# Altium PCB Central childboard.PcbDoc
Units mm, origin at the board's own origin, x right, y up, seen from the top; angles counter-clockwise.
Board outline 68.46 x 92.2 mm, 2 copper layers (Top Layer, Bottom Layer); 25 components, 48 nets, 134 pads, 97 vias.
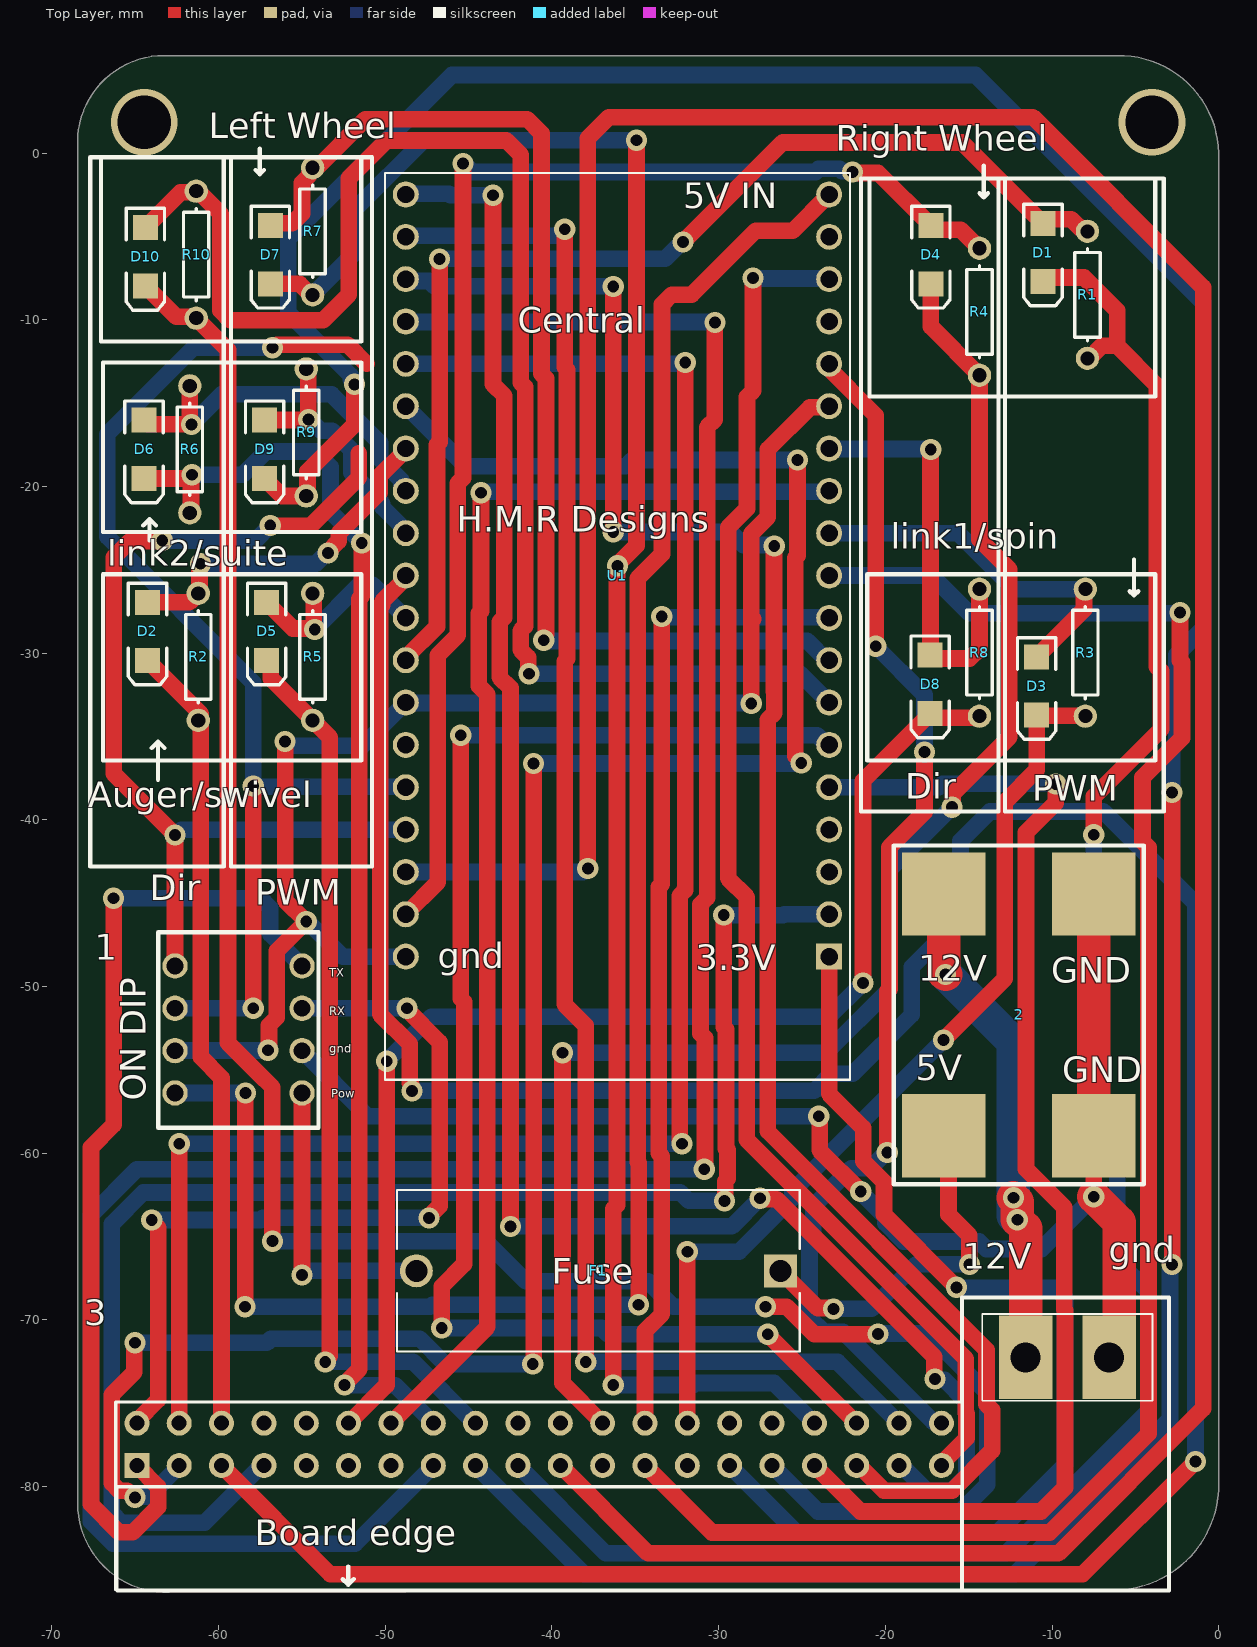
[diagram p0: Top Layer view]
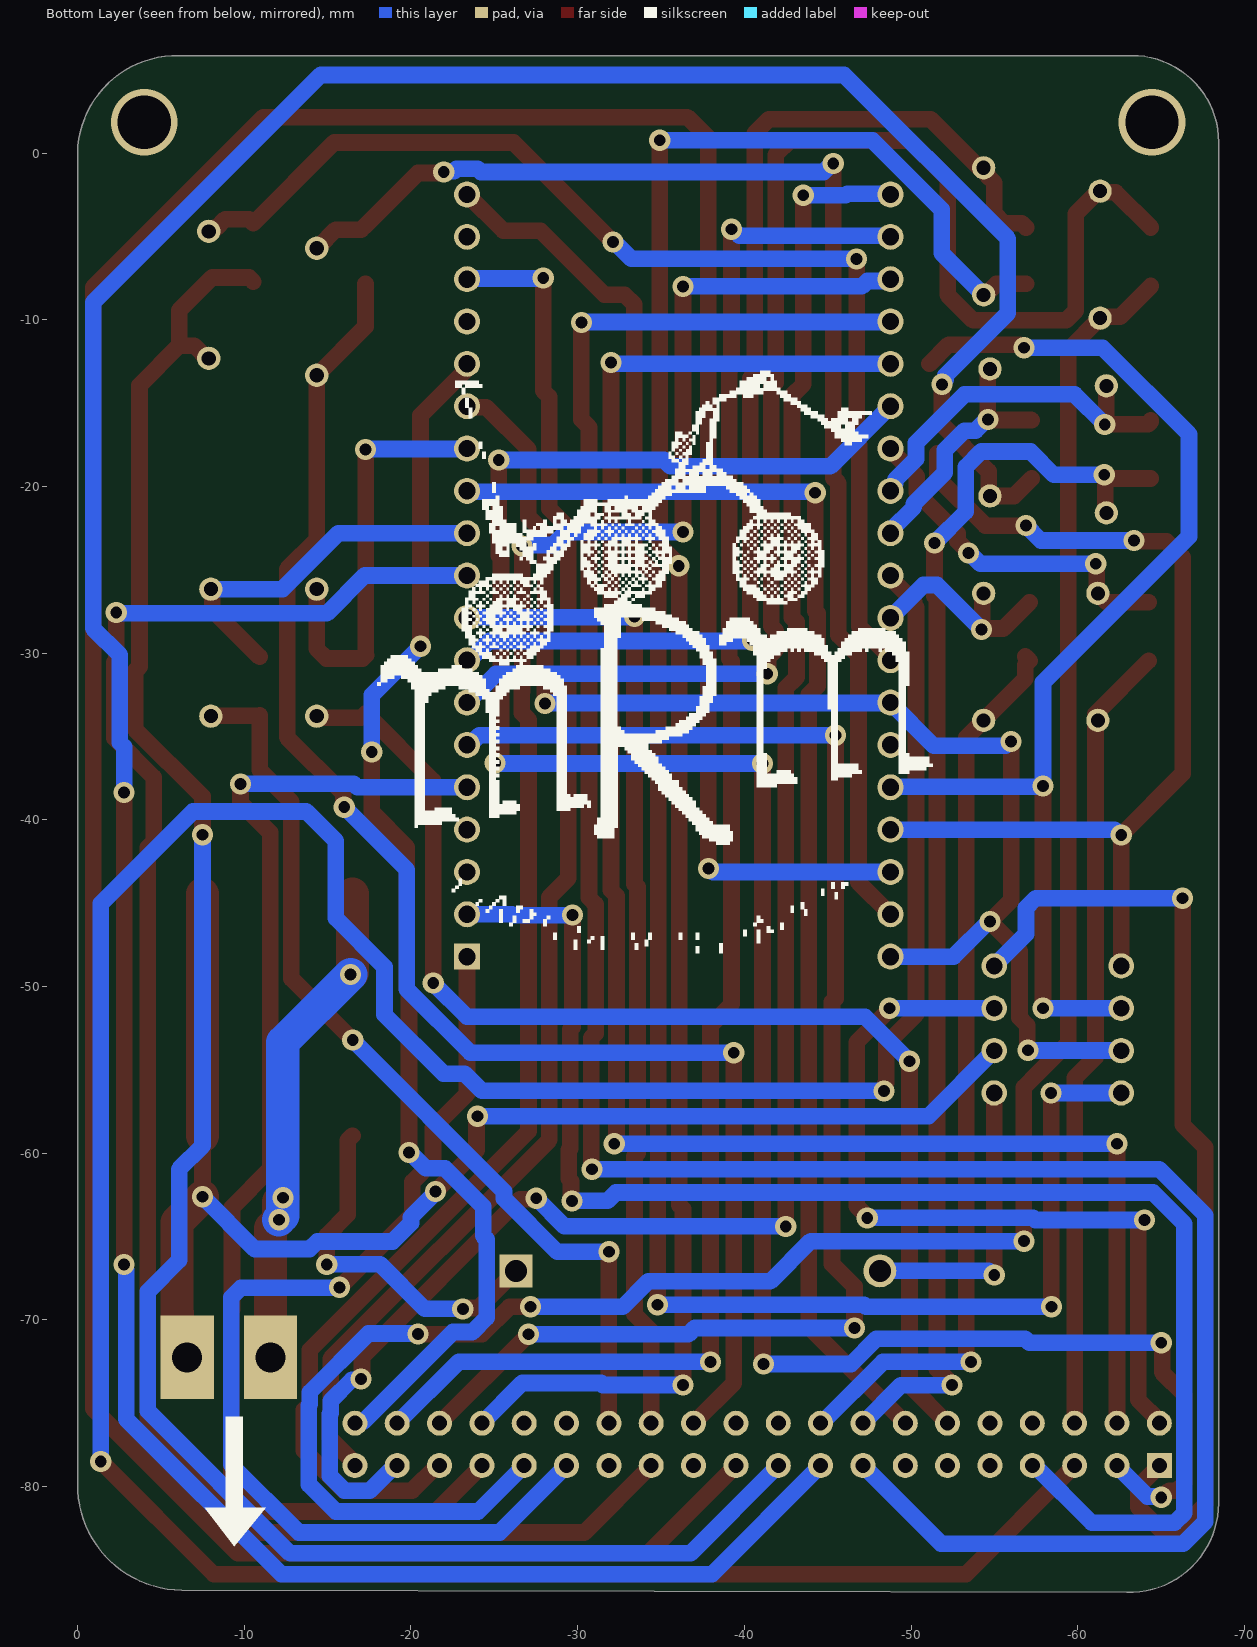
[diagram p1: Bottom Layer view, seen from below]

## Layer stack, top to bottom
Top Solder: solder mask 0.0102, Solder Resist, Dk 3.5
Top Layer: signal copper 0.0356
Dielectric 1: dielectric 0.32, FR-4, Dk 4.8
Bottom Layer: signal copper 0.0356
Bottom Solder: solder mask 0.0102, Solder Resist, Dk 3.5

## Board outline
-68.449,-80.997 -68.449,0.635 -68.459,0.635 cw(c-63.246,0.635) -63.246,5.848 -63.246,5.842 -6.096,5.842 cw(c-5.969,-0.127) 0,0 -0.002,-79.828 cw(c-6.319,-79.899) -6.248,-86.216 -62.95,-86.353 cw(c-63.091,-80.997)

## Design rules (kind name [scope] priority, off if disabled: settings)
Clearance [All] p1: gap=0.254 ignorepadtopadclearanceinfootprint=FALSE except(0: Arc-Hole Track-Hole SMDPad-Hole THPad-Hole Via-Hole Fill-Hole Poly-Hole Region-Hole Text-Hole)
PolygonConnect [All] p1: connectstyle=Relief reliefconductorwidth=0.254 reliefentries=4 polygonreliefangle="90 Angle" airgapwidth=0.254
RoutingVias [All] p1: holewidth=0.711 width=1.27 viastyle="Through Hole" minholewidth=0.711 minwidth=1.27 maxholewidth=0.711 maxwidth=1.27
SolderMaskExpansion [All] p1: expansion=0.102 istentingtop=FALSE
Width [All] p1: maxlimit=10 minlimit=0.254 preferedwidth=1 minimp=50.000000 maximp=50.000000 favimp=50.000000
30 further rules are at their usual default settings.

## Components (designator, comment, footprint, x,y, rotation, side; value= is the part's Value field where it differs from the comment)
1 "2.54 switch  dip" "2.54mm Pitch 4 Way DIP Slide Switch" -54.011,-58.468 r90 top
2 "microbuck" "Micro buck" -11.993,-51.7 r0 top
3 "breakoutboard" "breakoutboard connections" -69.997,-78.45 r270 top
D1 "LED2" 3.2X1.6X1.1 -10.541,-5.969 r270 top
D2 "LED2" 3.2X1.6X1.1 -64.262,-28.702 r270 top
D3 "LED2" 3.2X1.6X1.1 -10.922,-31.976 r270 top
D4 "LED2" 3.2X1.6X1.1 -17.272,-6.096 r270 top
D5 "LED2" 3.2X1.6X1.1 -57.108,-28.702 r270 top
D6 "LED2" 3.2X1.6X1.1 -64.469,-17.78 r270 top
D7 "LED2" 3.2X1.6X1.1 -56.896,-6.096 r270 top
D8 "LED2" 3.2X1.6X1.1 -17.305,-31.877 r270 top
D9 "LED2" 3.2X1.6X1.1 -57.235,-17.78 r270 top
D10 "LED2" 3.2X1.6X1.1 -64.389,-6.223 r270 top
F1 "4527" FUSE_4527 -37.211,-67.056 r180 top
R1 "Res1" AXIAL-0.3 -7.874,-8.509 r270 top value=1K
R2 "Res1" AXIAL-0.3 -61.214,-30.226 r270 top value=1K
R3 "Res1" AXIAL-0.3 -8.001,-29.972 r270 top value=1K
R4 "Res1" AXIAL-0.3 -14.351,-9.525 r270 top value=1K
R5 "Res1" AXIAL-0.3 -54.356,-30.226 r270 top value=1K
R6 "Res1" AXIAL-0.3 -61.722,-17.78 r270 top value=1K
R7 "Res1" AXIAL-0.3 -54.356,-4.699 r270 top value=1K
R8 "Res1" AXIAL-0.3 -14.351,-29.972 r270 top value=1K
R9 "Res1" AXIAL-0.3 -54.737,-16.764 r270 top value=1K
R10 "Res1" AXIAL-0.3 -61.341,-6.096 r270 top value=1K
U1 "ESP32-DEVKITC-32D" MODULE_ESP32-DEVKITC-32D -36.068,-28.448 r180 top

## Footprints (in the part's own frame and the unit in brackets; to place one, negate y for a bottom-side part, rotate by r counter-clockwise, add the part's x,y. Pads: shape width x height; smd on the part's side, far side on the other; paste and mask are expansions set on the pad)
"2.54mm Pitch 4 Way DIP Slide Switch" [mm]
  round 1.524 hole 1: 1(2.08,0.98) 2(4.62,0.98) 3(7.16,0.98) 4(9.7,0.98) 5(2.08,8.6) 6(4.62,8.6) 7(7.16,8.6) 8(9.7,8.6)
  silkscreen extent 0,0 11.72,9.6
3.2X1.6X1.1 [mm] "SMT LED; 2 Flat Leads"
  rect 1.5x1.5 smd: 1(-1.75,0) 2(1.75,0)
  silkscreen extent -2.9,-1.15 3.2,1.15
AXIAL-0.3 [mm] "Axial Device, Thru-Hole; 2 Leads; 0.3 in Pin Spacing"
  round 1.4 hole 0.85: 1(-3.81,0) 2(3.81,0)
  silkscreen extent -2.77,-0.76 2.77,0.76
"breakoutboard connections" [mm]
  rect 1.5x1.5 hole 0.9: 1(0.29,5.1)
  round 1.5 hole 0.9: 2(-2.25,5.1) 3(0.29,7.64) 4(-2.25,7.64) 5(0.29,10.18) 6(-2.25,10.18) 7(0.29,12.72) 8(-2.25,12.72) 9(0.29,15.26) 10(-2.25,15.26) 11(0.29,17.8) 12(-2.25,17.8) 13(0.29,20.34) 14(-2.25,20.34) 15(0.29,22.88) 16(-2.25,22.88) 17(0.29,25.42) 18(-2.25,25.42) 19(0.29,27.96) 20(-2.25,27.96) 21(0.29,30.5) 22(-2.25,30.5) 23(0.29,33.04) 24(-2.25,33.04) 25(0.29,35.58) 26(-2.25,35.58) 27(0.29,38.12) 28(-2.25,38.12) 29(0.29,40.66) 30(-2.25,40.66) 31(0.29,43.2) 32(-2.25,43.2) 33(0.29,45.74) 34(-2.25,45.74) 35(0.29,48.28) 36(-2.25,48.28) 37(0.29,50.82) 38(-2.25,50.82) 39(0.29,53.36) 40(-2.25,53.36)
  rect 5x3.2 hole 1.8: Pow+(-6.198,58.421) Pow-(-6.198,63.421)
  silkscreen extent -9.8,3.83 7.79,67.02, body extent -7,55.82 5.7,66.02, height 5.3
FUSE_4527 [mm]
  rect 1.98x1.98 hole 1.32: 1(-10.92,0)
  round 1.98 hole 1.32: 2(10.92,0)
  silkscreen extent -12.08,-4.85 12.08,4.85
"Micro buck" [mm]
  rect 5x5 smd: 1(-4.5,7.25) 2(4.5,7.25) 3(-4.5,-7.25) 4(4.5,-7.25)
  silkscreen extent -7.5,-10.16 7.5,10.16
MODULE_ESP32-DEVKITC-32D [mm]
  rect 1.56x1.56 hole 1.04: 1(-12.7,19.76)
  round 1.56 hole 1.04: 2(-12.7,17.22) 3(-12.7,14.68) 4(-12.7,12.14) 5(-12.7,9.6) 6(-12.7,7.06) 7(-12.7,4.52) 8(-12.7,1.98) 9(-12.7,-0.56) 10(-12.7,-3.1) 11(-12.7,-5.64) 12(-12.7,-8.18) 13(-12.7,-10.72) 14(-12.7,-13.26) 15(-12.7,-15.8) 16(-12.7,-18.34) 17(-12.7,-20.88) 18(-12.7,-23.42) 19(-12.7,-25.96) 20(12.7,19.76) 21(12.7,17.22) 22(12.7,14.68) 23(12.7,12.14) 24(12.7,9.6) 25(12.7,7.06) 26(12.7,4.52) 27(12.7,1.98) 28(12.7,-0.56) 29(12.7,-3.1) 30(12.7,-5.64) 31(12.7,-8.18) 32(12.7,-10.72) 33(12.7,-13.26) 34(12.7,-15.8) 35(12.7,-18.34) 36(12.7,-20.88) 37(12.7,-23.42) 38(12.7,-25.96)
  silkscreen extent -13.95,-27.25 13.95,27.15

## Part data
D1 D2 D3 D4 D5 D6 D7 D8 D9 D10: "Typical RED, GREEN, YELLOW, AMBER GaAs LED", LatestRevisionDate=17-Jul-2002, LatestRevisionNote="Re-released for DXP Platform.", PackageDescription="SM LED; 2 Flat Leads", PackageReference=3.2X1.6X1.1, PackageVersion=Feb-2002, Published=8-Jun-2000, Publisher="Altium Limited"
F1: "Fuseholder; 5 A; 250 V; Nylon; Base only; Brass, Tin Plate (Contact)", Package=None, Availability=Unavailable, MP=4527, Price=None
R1 R2 R3 R4 R5 R6 R7 R8 R9 R10: "Resistor", LatestRevisionDate=17-Jul-2002, LatestRevisionNote="Re-released for DXP Platform.", PackageDescription="Axial Device, Thru-Hole; 2 Leads; 0.3 in Pin Spacing", PackageReference=AXIAL-0.3, Published=8-Jun-2000, Publisher="Altium Limited"
U1: "Eval Board For Esp-Wroom-32", Package=None, Availability=Unavailable, MP=ESP32-DEVKITC-32D, Price=None

## Via types
v1: diameter 1.27, hole 0.711, Top Layer to Bottom Layer, 95 vias
v2: diameter 4, hole 3.2, Top Layer to Bottom Layer, 2 vias

## Nets (pads, with @x,y where several pads share a name; then routed paths per layer and width w, separated by ;. In a path a pad name is that pad's centre, name@x,y a point inside that pad or via, vN(x,y) a via of type N, cw(c..) or ccw(c..) an arc to the next point about the centre after c; other vN are vias at no path point)
Net1_1: 1.1 F1.2 | length 17.9
  Top Layer w1: v1(-54.991,-67.31) 1.1
  Bottom Layer w1: v1(-54.991,-67.31) -54.918,-67.31 -54.664,-67.056 F1.2
Net1_2: 1.2 2.2 2.4 3.Pow- | length 83.8
  Top Layer w1: v1(-23.991,-57.785) -23.939,-57.837 -23.939,-59.831 v1(-21.472,-62.298) ; v1(-7.493,-62.611) 2.4
  Top Layer w2: v1(-7.493,-62.611) -5.969,-64.135 -5.969,-69.58 -5.976,-69.587 -5.976,-71.652 3.Pow- ; 2.4 2.2
  Bottom Layer w1: 1.2 -51.054,-57.785 v1(-23.991,-57.785) ; v1(-21.472,-62.298) -21.472,-62.371 -20.006,-63.837 -20.006,-64.195 -18.907,-65.294 -14.38,-65.294 -13.928,-65.746 -10.628,-65.746 v1(-7.493,-62.611)
Net1_3: 1.3 3.2 | length 49.5
  Top Layer w1: 3.2 -64.897,-76.065 -63.623,-74.791 -63.623,-64.466 -64.008,-64.081 v1(-64.008,-64.008) ; v1(-48.7,-51.308) -48.7,-51.381 -46.736,-53.345 -46.736,-63.173 -47.371,-63.808 v1(-47.371,-63.881)
  Bottom Layer w1: v1(-64.008,-64.008) -57.463,-64.008 -57.336,-63.881 v1(-47.371,-63.881) ; 1.3 v1(-48.7,-51.308)
Net1_4: 1.4 3.1 | length 59.5
  Top Layer w1: v1(-66.294,-44.704) -66.294,-58.293 -67.655,-59.654 -67.655,-81.062 -65.974,-82.743 -65.146,-82.743 -63.623,-81.22 -63.623,-80.014 3.1
  Bottom Layer w1: v1(-66.294,-44.704) -57.482,-44.704 -56.896,-45.29 -56.896,-46.863 1.4 ; 3.1 -64.897,-78.863 3.1@-64.77,-78.99
Net1_5: 1.5 U1.19 | length 114.1
  Top Layer w1: v1(-58.42,-69.215) -58.405,-69.2 -58.405,-56.403 v1(-58.39,-56.388) ; v1(-34.798,-69.088) -34.798,-60.578 -34.845,-60.531 -34.845,-25.506 -33.401,-24.062 -33.401,-9.087 -32.815,-8.501 -31.615,-8.501 -27.779,-4.665 -25.544,-4.665 U1.19
  Bottom Layer w1: 1.5 v1(-58.39,-56.388) ; v1(-58.42,-69.215) -47.303,-69.215 -47.176,-69.088 v1(-34.798,-69.088)
Net1_6: 1.6 U1.14 U1.20 U1.26 | length 82.2
  Top Layer w1: v1(-57.023,-53.828) -56.971,-53.777 -56.971,-52.324 -56.507,-51.859 -56.507,-47.871 v1(-54.737,-46.101) -56.007,-44.831 v1@-56.007,-35.379 ; U1.20@-48.92,-48.208 U1.20 ; v1(-28.043,-33.02) -28.043,-28.068 -27.932,-27.957 -28.051,-27.838 -28.051,-22.849 -27.043,-21.841 -27.043,-17.772 -24.526,-15.255 -23.435,-15.255 U1.14
  Bottom Layer w1: 1.6 -62.601,-53.838 -57.033,-53.838 v1(-57.023,-53.828) ; v1(-56.007,-35.306) -55.934,-35.306 -55.68,-35.56 -51.36,-35.56 U1.26 -48.742,-32.994 -28.069,-32.994 v1(-28.043,-33.02) ; v1(-54.737,-46.101) -54.664,-46.101 -52.557,-48.208 U1.20
Net1_7: 1.7 U1.24 | length 70.2
  Top Layer w1: v1(-57.92,-51.308) v1(-57.92,-37.973) ; v1(-56.769,-11.684) -56.696,-11.684 -56.512,-11.5 -52.262,-11.5 -51.114,-12.648
  Bottom Layer w1: 1.7 v1(-57.92,-51.308) ; v1(-56.769,-11.684) -61.492,-11.684 -66.675,-16.867 -66.675,-23.011 -57.92,-31.766 v1(-57.92,-37.973) -57.882,-38.011 -48.805,-38.011 U1.24
Net1_8: 1.8 U1.23 | length 58.2
  Top Layer w1: v1(-63.373,-23.241) -63.425,-23.293 -65.33,-23.293 -66.294,-24.257 -66.294,-37.221 v1(-62.611,-40.904) 1.8 ; v1(-56.896,-22.352) -54.459,-22.352 -51.591,-19.484 -51.591,-18.011
  Bottom Layer w1: v1(-63.373,-23.241) -57.785,-23.241 v1(-56.896,-22.352) ; v1(-62.611,-40.904) -62.538,-40.904 -62.222,-40.588 U1.23
Net2_1: 2.1 3.Pow+ | length 31.3
  Top Layer w2: 2.1 -16.493,-49.166 v1(-16.383,-49.276) ; v1(-12.319,-62.671) -12.081,-62.909 v1(-12.081,-63.992) -11.576,-64.497 3.Pow+
  Bottom Layer w2: v1(-16.383,-49.276) -12.319,-53.34 -12.319,-63.754 v1(-12.081,-63.992)
Net2_3: 2.3 F1.1 | length 21.8
  Top Layer w1: F1.1 -24.057,-69.29 -23.166,-69.29 v1(-23.114,-69.342) ; 2.3 -16.208,-59.235 -16.208,-63.675 -14.955,-64.928 v1(-14.955,-66.683)
  Bottom Layer w1: v1(-23.114,-69.342) -20.828,-69.342 -18.144,-66.658 -14.98,-66.658 v1(-14.955,-66.683)
Net3_3: 3.3 U1.33 | length 134.5
  Top Layer w1: v1(-65.012,-80.645) -65.085,-80.645 -65.486,-80.244 -65.959,-80.244 -66.401,-79.802 -66.401,-74.487 -65.064,-73.15 -65.064,-71.426 v1(-65.012,-71.374) ; v1(-41.148,-72.644) -41.096,-72.592 v1(-41.096,-36.628) v1@-41.148,-36.576 ; v1(-25.273,-18.415) -25.273,-24.145 -25.4,-24.272 -25.4,-36.173 -25.045,-36.529 v1(-25.045,-36.602)
  Bottom Layer w1: v1(-65.012,-80.645) -64.96,-80.593 -64.184,-80.593 -62.357,-78.766 3.3 ; v1(-65.012,-71.374) -57.099,-71.374 -56.853,-71.128 -47.93,-71.128 -46.414,-72.644 v1(-41.148,-72.644) ; U1.33 -45.16,-18.796 -35.571,-18.796 -35.19,-18.415 v1(-25.273,-18.415) ; v1(-41.096,-36.628) -25.071,-36.628 v1(-25.045,-36.602) v1@-25.019,-36.576
Net3_4: 3.4 U1.34 | length 110.8
  Top Layer w1: 3.4 v1(-62.357,-59.436) ; v1(-32.202,-59.436) -32.202,-59.363 -32.337,-59.228 -32.337,-44.555 -32.004,-44.222 v1(-32.004,-12.573)
  Bottom Layer w1: v1(-62.357,-59.436) v1(-32.202,-59.436) ; U1.34 -32.079,-12.648 v1(-32.004,-12.573)
Net3_5: 3.5 U1.29 | length 190.3
  Top Layer w1: 3.5 -53.297,-85.26 -8.171,-85.26 v1(-1.397,-78.486) ; U1.29 -48.768,-25.5 -50.181,-26.913 -50.181,-27.132 -50.302,-27.253 -50.302,-51.671 -48.522,-53.451 -48.522,-55.799 -48.439,-55.882 -48.439,-56.209 v1(-48.387,-56.261)
  Bottom Layer w1: v1(-48.387,-56.261) -24.257,-56.261 -23.225,-55.229 -21.95,-55.229 -18.415,-51.694 -18.415,-48.828 -15.494,-45.907 -15.494,-41.275 -13.724,-39.505 -6.918,-39.505 -1.397,-45.026 v1(-1.397,-78.486)
Net3_6: 3.6 D2.2 R2.2 | length 47.6
  Top Layer w1: D2.2 -61.063,-33.651 -61.063,-54.235 -59.817,-55.481 3.6
Net3_7: 3.7 U1.2 | length 89.5
  Top Layer w1: v1(-29.694,-45.72) -29.694,-52.44 -29.559,-52.575 -29.559,-59.722 -29.472,-59.809 -29.472,-61.543 -29.606,-61.677 -29.606,-62.82 v1(-29.657,-62.872)
  Bottom Layer w1: 3.7 -57.412,-78.74 -60.841,-82.169 -65.815,-82.169 -66.401,-81.583 -66.401,-64.242 -64.516,-62.357 -32.292,-62.357 -31.792,-62.857 -29.672,-62.857 v1(-29.657,-62.872) ; v1(-29.694,-45.72) -26.119,-45.72 -26.067,-45.668 U1.2
Net3_12: 3.12 D8.2 R8.2 | length 74
  Top Layer w1: 3.12 -49.911,-73.914 v1(-49.911,-54.483) ; v1(-21.336,-49.784) -21.336,-37.658 D8.2 -17.055,-33.877 -14.554,-33.877 -14.536,-33.859 R8.2@-14.532,-33.862 ; R8.2@-14.546,-33.877 R8.2@-14.496,-33.927
  Bottom Layer w1: v1(-49.911,-54.483) -47.244,-51.816 -23.368,-51.816 v1(-21.336,-49.784)
Net3_14: 3.14 U1.12 | length 79.4
  Top Layer w1: 3.14 -43.874,-70.418 -43.874,-32.483 -44.386,-31.972 -44.386,-27.616 -44.251,-27.481 v1(-44.251,-20.38)
  Bottom Layer w1: v1(-44.251,-20.38) -44.199,-20.328 -23.428,-20.328 U1.12
Net3_15: 3.15 U1.35 | length 149.2
  Top Layer w1: v1(-30.861,-60.968) -30.813,-60.92 -30.813,-53.094 -31.083,-52.824 -31.083,-45.075 -30.686,-44.678 -30.686,-16.447 -30.226,-15.987 v1(-30.226,-10.16)
  Bottom Layer w1: U1.35 -48.742,-10.134 -30.252,-10.134 v1(-30.226,-10.16) ; 3.15 -51.8,-83.423 -66.335,-83.423 -67.655,-82.103 -67.655,-63.723 -64.892,-60.96 -30.869,-60.96 v1(-30.861,-60.968)
Net3_16: 3.16 D6.2 R6.2 | length 76.9
  Top Layer w1: D6.2@-64.389,-19.53 -61.894,-19.53 -61.668,-19.304 v1(-61.595,-19.304) -61.647,-19.356 R6.2@-61.647,-21.463 ; v1(-52.451,-73.914) -52.451,-73.841 -51.556,-72.946 -51.556,-26.733 -51.405,-26.583 v1(-51.405,-23.398)
  Bottom Layer w1: v1(-61.595,-19.304) -58.562,-19.304 -57.165,-17.907 -54.205,-17.907 -53.283,-18.829 -53.283,-21.52 v1(-51.405,-23.398) ; v1(-52.451,-73.914) -49.403,-73.914 3.16
Net3_17: 3.17 D9.2 R9.2 | length 201.8
  Top Layer w1: D9.2 -56.191,-20.574 -54.922,-20.574 -54.868,-20.52 -54.868,-20.443 -54.715,-20.443 -54.66,-20.389 -54.66,-19.1 -51.85,-16.29 v1(-51.85,-13.877) ; v1(-2.794,-66.675) v1(-2.794,-38.354)
  Bottom Layer w1: v1(-51.85,-13.877) -51.85,-13.804 -52.07,-13.584 -52.07,-13.335 -55.81,-9.595 -55.81,-5.137 -45.99,4.683 -14.589,4.683 -0.937,-8.969 -0.937,-28.515 -2.54,-30.118 -2.54,-35.363 -2.794,-35.617 v1(-2.794,-38.354) ; 3.17 -38.057,-85.26 -12.24,-85.26 -2.921,-75.941 -2.921,-66.993 -2.846,-66.918 -2.846,-66.727 v1(-2.794,-66.675)
Net3_18: 3.18 D5.2 R5.2 | length 54.6
  Top Layer w1: D5.2@-56.858,-30.202 D5.2 -56.858,-30.702 -56.858,-31.534 -53.324,-35.068 -53.324,-72.174 -53.594,-72.444 v1(-53.594,-72.517)
  Bottom Layer w1: v1(-53.594,-72.517) -48.315,-72.517 -44.632,-76.2 3.18
Net3_19: 3.19 D1.2 R1.2 | length 121.3
  Top Layer w1: D1.2 -10.291,-7.469 -8.079,-7.469 -6.096,-9.452 -6.096,-11.557 ; R1.2 -7.766,-12.319 -7.004,-11.557 -6.096,-11.557 ; v1@-7.493,-41.021 -7.493,-38.603 -3.461,-34.571 -3.461,-31.078 -3.715,-30.824 -3.715,-13.938 -6.096,-11.557
  Bottom Layer w1: 3.19 -36.771,-84.006 -12.759,-84.006 -4.222,-75.469 -4.222,-68.295 -6.096,-66.421 -6.096,-60.96 -7.493,-59.563 v1(-7.493,-40.894)
Net3_21: 3.21 U1.22 | length 208.1
  Top Layer w1: 3.21 -34.231,-84.006 -9.617,-84.006 -0.937,-75.326 -0.937,-8.06 -11.148,2.151 -36.584,2.151 -37.846,0.889 v1(-37.846,-42.926)
  Bottom Layer w1: U1.22 -38.121,-43.128 -37.919,-42.926 v1(-37.846,-42.926)
Net3_24: 3.24 D4.2 R4.2 | length 91.7
  Top Layer w1: v1(-39.37,-53.975) -39.37,-73.787 3.24 ; D4.2 -17.272,-10.414 R4.2 -14.351,-23.187 -12.573,-24.965 -12.573,-35.052 -15.95,-38.429 -15.95,-39.191 v1(-16.002,-39.243)
  Bottom Layer w1: v1(-39.37,-53.975) -23.563,-53.975 -19.756,-50.169 -19.756,-42.997 v1(-16.002,-39.243)
Net3_25: 3.25 U1.10 | length 106.8
  Top Layer w1: 3.25 -30.405,-82.752 -10.136,-82.752 -4.215,-76.831 -4.215,-41.662 -4.572,-41.305 -4.572,-37.456 -2.207,-35.091 -2.207,-30.559 -2.326,-30.44 v1(-2.326,-27.559)
  Bottom Layer w1: U1.10 -17.221,-25.348 -14.953,-27.616 -2.456,-27.616 -2.399,-27.559 v1(-2.326,-27.559)
Net3_26: 3.26 U1.9 | length 59
  Top Layer w1: 3.26 -34.417,-70.671 -33.409,-69.663 -33.409,-60.193 -33.591,-60.011 -33.591,-44.036 -33.409,-43.854 v1(-33.409,-27.805)
  Bottom Layer w1: v1(-33.409,-27.805) -33.367,-27.847 -23.409,-27.847 U1.9
Net3_28: 3.28 D3.2 R3.2 | length 56.1
  Top Layer w1: v1@-32.004,-65.786 v1(-31.877,-65.913) 3.28 ; v1(-16.51,-53.213) -12.827,-49.53 -12.827,-38.93 -10.922,-37.025 D3.2 -10.894,-33.754 -8.029,-33.754 R3.2
  Bottom Layer w1: v1(-31.877,-65.913) -28.77,-65.913 -25.586,-62.73 -25.586,-62.289 v1(-16.51,-53.213)
Net3_29: 3.29 U1.1 | length 63.3
  Top Layer w1: U1.1 -23.368,-56.444 -21.328,-58.484 -21.328,-60.477 -20.083,-61.723 -20.083,-63.687 v1(-15.723,-68.047)
  Bottom Layer w1: 3.29 -25.325,-82.752 -13.283,-82.752 -9.222,-78.691 -9.222,-68.658 -9.808,-68.072 -15.698,-68.072 v1(-15.723,-68.047)
Net3_31: 3.31 D10.2 R10.2 | length 128
  Top Layer w1: D10.2 -62.533,-9.829 -61.418,-9.829 R10.2 -59.431,-11.816 -59.431,-53.384 -57.598,-55.217 -57.597,-55.217 -56.769,-56.045 v1(-56.769,-65.278) ; v1(-27.178,-69.215) -25.905,-69.215 -24.268,-70.852 v1(-20.433,-70.852)
  Bottom Layer w1: v1(-56.769,-65.278) -43.979,-65.278 -41.566,-67.691 -34.231,-67.691 -32.707,-69.215 v1(-27.178,-69.215) ; 3.31 -24.039,-81.498 -15.495,-81.498 -13.879,-79.882 -13.879,-75.115 -13.93,-75.064 -13.93,-74.34 -17.449,-70.821 -20.402,-70.821 v1(-20.433,-70.852)
Net3_33: 3.33 U1.5 | length 74.4
  Top Layer w1: 3.33 -21.499,-81.498 -10.656,-81.498 -9.222,-80.064 -9.222,-69.44 -9.263,-69.399 -9.263,-63.246 -11.557,-60.952 -11.557,-40.767 -9.779,-38.989 v1(-9.779,-37.846)
  Bottom Layer w1: U1.5 -16.771,-38.048 -16.569,-37.846 v1(-9.779,-37.846)
Net3_34: 3.34 D7.2 R7.2 | length 116
  Top Layer w1: D7.2 -55.127,-7.846 -54.464,-8.509 R7.2 ; v1(-36.322,-73.906) -36.322,-63.339 -36.099,-63.116 -36.099,-24.723 -34.925,-23.549 v1(-34.925,0.762)
  Bottom Layer w1: R7.2 -51.841,-5.994 -51.841,-3.392 -47.687,0.762 v1(-34.925,0.762) ; v1(-36.322,-73.906) -31.519,-73.906 -31.4,-73.787 -26.67,-73.787 3.34
  other v1: -36.068,-24.765
Net3_35: 3.35 U1.36 | length 107.1
  Top Layer w1: v1(-36.322,-22.733) v1(-36.322,-8.001) ; v1(-26.662,-23.57) -26.678,-23.586 -26.678,-32.31 -26.654,-32.334 -26.654,-33.595 -27.051,-33.992 -27.051,-58.683 -13.93,-71.804 -13.93,-75.064 -13.589,-75.405 -13.589,-77.846 -15.987,-80.244 -20.078,-80.244 -21.582,-78.74 3.35
  Bottom Layer w1: U1.36 -48.661,-7.675 -47.375,-7.675 -47.049,-8.001 v1(-36.322,-8.001) ; v1(-36.322,-22.733) -29.297,-22.733 -28.512,-23.518 -26.714,-23.518 v1(-26.662,-23.57)
Net3_36: 3.36 U1.6 | length 85.7
  Top Layer w1: v1(-46.609,-70.485) -46.609,-68 -45.263,-66.655 -45.263,-50.928 -45.466,-50.725 v1(-45.466,-34.925) ; v1(-27.051,-70.866) 3.36
  Bottom Layer w1: v1(-46.609,-70.485) -37.02,-70.485 -36.639,-70.866 v1(-27.051,-70.866) ; v1@-45.393,-34.925 -24.103,-34.925 -23.52,-35.508 U1.6
Net3_37: 3.37 U1.38 | length 111.1
  Top Layer w1: v1(-43.537,-2.532) -43.537,-13.88 -42.862,-14.555 -42.862,-27.866 -43.132,-28.136 -43.132,-31.452 -42.485,-32.099 v1(-42.485,-64.389) ; v1(-27.523,-62.702) -27.471,-62.754 -26.527,-62.754 -17.062,-72.219 -17.062,-73.489 v1(-17.01,-73.541)
  Bottom Layer w1: U1.38 -48.726,-2.447 -46.172,-2.447 -46.086,-2.532 v1(-43.537,-2.532) ; v1(-42.485,-64.389) -29.21,-64.389 v1(-27.523,-62.702) ; 3.37 -19.042,-78.74 -17.538,-80.244 -16.014,-80.244 -15.133,-79.363 -15.133,-75.635 -15.184,-75.584 -15.184,-74.859 -16.45,-73.593 -16.958,-73.593 v1(-17.01,-73.541)
Net3_38: 3.38 U1.37 | length 98.6
  Top Layer w1: v1(-39.235,-4.572) -39.235,-12.861 -39.1,-12.996 -39.1,-30.345 -39.235,-30.48 -39.235,-51.075 -37.973,-52.337 v1(-37.973,-72.517)
  Bottom Layer w1: U1.37 -48.701,-4.961 -39.697,-4.961 -39.308,-4.572 v1(-39.235,-4.572) ; v1(-37.973,-72.517) -22.86,-72.517 3.38
Net3_39: 3.39 U1.17 | length 83
  Top Layer w1: v1(-27.94,-7.493) -27.94,-14.265 -28.297,-14.622 -28.297,-21.321 -29.432,-22.456 -29.432,-43.51 -28.305,-44.637 -28.305,-59.203 -15.184,-72.324 -15.184,-75.584 -15.133,-75.635 -15.133,-77.101 -16.637,-78.605 3.39
  Bottom Layer w1: v1(-27.94,-7.493) -27.902,-7.531 -23.406,-7.531 U1.17
Net3_40: 3.40 U1.15 | length 73.7
  Top Layer w1: U1.15@-23.622,-12.7 -20.574,-15.748 v1(-20.574,-29.591) ; v1(-19.884,-59.957) -19.884,-50.297 -19.747,-50.159 -19.747,-41.638 -17.653,-39.544 v1(-17.653,-35.941)
  Bottom Layer w1: v1(-20.574,-29.591) -17.653,-32.512 v1(-17.653,-35.941) ; v1(-19.884,-59.957) -19.957,-59.957 -20.909,-60.909 -22.047,-60.909 -24.332,-63.194 -24.332,-64.956 -24.547,-65.171 -24.547,-69.873 -23.689,-70.731 -22.519,-70.731 -17.146,-76.104 -16.733,-76.104 3.40
NetD1_1: D1.1 R1.1 U1.27 | length 69.1
  Top Layer w1: U1.27 -48.768,-30.277 -46.894,-28.403 -46.894,-17.492 -46.736,-17.334 v1(-46.736,-6.35) ; v1(-32.131,-5.334) -26.162,0.635 -15.395,0.635 D1.1 -10.291,-3.969 -8.858,-3.969 -8.328,-4.499 -8.182,-4.499 R1.1@-7.874,-4.807
  Bottom Layer w1: v1(-46.736,-6.35) -33.22,-6.35 -32.204,-5.334 v1(-32.131,-5.334)
NetD2_1: D2.1 R2.1 U1.32 | length 21.3
  Top Layer w1: D2.1 -61.75,-26.952 R2.1 ; R2.1@-61.214,-26.543 -61.139,-26.468 -61.139,-24.69 v1(-61.087,-24.638) ; v1(-53.443,-24.003) -53.443,-23.93 -52.794,-23.281 -52.794,-22.822 -50.337,-20.365 -50.337,-19.384 -48.768,-17.815 U1.32
  Bottom Layer w1: v1(-61.087,-24.638) -54.151,-24.638 -53.516,-24.003 v1(-53.443,-24.003)
NetD3_1: D3.1 R3.1 U1.11 | length 22.1
  Top Layer w1: D3.1 -8.078,-27.382 -8.078,-26.239 R3.1 ; R3.1@-8.186,-26.239 R3.1@-8.142,-26.282
  Bottom Layer w1: U1.11 -15.649,-22.808 -12.295,-26.162 R3.1
NetD4_1: D4.1 R4.1 U1.21 | length 79.5
  Top Layer w1: U1.21 -46.855,-43.755 -46.855,-30.137 -45.64,-28.922 -45.64,-19.804 -45.339,-19.503 v1(-45.339,-0.635) ; v1(-21.971,-1.143) -21.919,-1.195 -20.423,-1.195 D4.1 -17.022,-4.596 -15.482,-4.596 R4.1@-14.478,-5.6
  Bottom Layer w1: v1(-45.339,-0.635) -45.266,-0.635 -44.758,-1.143 -24.192,-1.143 -24.003,-0.954 -22.733,-0.954 -22.595,-1.091 -22.023,-1.091 v1(-21.971,-1.143)
NetD5_1: D5.1 R5.1 U1.28 | length 13.1
  Top Layer w1: D5.1 -55.536,-28.523 v1@-54.281,-28.523 ; R5.1@-54.229,-26.491 -54.281,-26.543 v1@-54.281,-28.523 ; v1@-54.281,-28.523 v1(-54.229,-28.575) v1@-54.281,-28.523
  Bottom Layer w1: v1(-54.229,-28.575) -51.569,-25.915 -50.741,-25.915 U1.28
NetD6_1: D6.1 R6.1 U1.31 | length 22.1
  Top Layer w1: D6.1@-64.389,-16.03 -64.389,-16.11 -64.219,-16.28 v1(-61.622,-16.28) -61.722,-16.18 R6.1
  Bottom Layer w1: v1(-61.622,-16.28) -59.82,-14.478 -53.213,-14.478 -50.302,-17.389 -50.302,-18.363 -49.048,-19.617 -49.048,-19.837 -48.768,-20.117 U1.31
NetD7_1: D7.1 R7.1 U1.8 | length 68.7
  Top Layer w1: D7.1@-56.896,-4.473 -56.646,-4.223 -55.584,-4.223 -54.998,-3.637 -54.998,-1.785 -54.556,-1.343 -54.556,-1.197 -54.375,-1.016 -54.229,-1.016 -51.181,2.032 -41.48,2.032 -40.624,1.176 -40.624,-13.246 -40.354,-13.516 -40.354,-28.905 -40.437,-28.988 -40.437,-29.179 v1(-40.489,-29.23)
  Bottom Layer w1: v1(-40.489,-29.23) -40.45,-29.27 -24.678,-29.27 -23.52,-30.428 U1.8
NetD8_1: D8.1 R8.1 U1.13 | length 25.4
  Top Layer w1: v1@-17.324,-17.728 v1(-17.272,-17.78) ; v1@-17.288,-17.78 -17.288,-30.111 D8.1 -17.103,-30.329 -14.937,-30.329 -14.351,-29.743 R8.1
  Bottom Layer w1: U1.13 -23.342,-17.754 -17.298,-17.754 v1(-17.272,-17.78)
NetD9_1: D9.1 R9.1 U1.30 | length 15.4
  Top Layer w1: D9.1 -57.217,-16.012 -54.628,-16.012 v1(-54.61,-15.994) -54.61,-13.364 -54.66,-13.313 -54.66,-13.031 R9.1
  Bottom Layer w1: v1(-54.61,-15.994) -54.537,-15.994 -53.878,-16.653 -53.197,-16.653 -52.029,-17.821 -52.029,-19.176 -50.173,-21.032 -50.173,-21.252 -48.768,-22.657 U1.30
NetD10_1: D10.1 R10.1 U1.7 | length 89.3
  Top Layer w1: D10.1 -62.278,-2.363 -61.418,-2.363 R10.1 -61.238,-2.286 -59.887,-3.637 -59.887,-9.455 -59.301,-10.041 -53.729,-10.041 -52.197,-8.509 -52.197,-1.524 -49.919,0.754 -42.734,0.754 -41.878,-0.102 -41.878,-13.765 -41.608,-14.035 -41.608,-28.385 -41.878,-28.655 -41.878,-29.806 -41.43,-30.254 -41.43,-31.19 v1(-41.378,-31.242)
  Bottom Layer w1: v1(-41.378,-31.242) -25.094,-31.242 U1.7
NetU1_25: U1.25
pads on no net: 3.8 3.9 3.10 3.11 3.13 3.20 3.22 3.23 3.27 3.30 3.32 U1.3 U1.4 U1.16 U1.18
copper on no net:
  other v2: -64.453,1.842 -4,1.842

## Silkscreen, mask and mechanical layers (free items; w line width, h text height)
Top Overlay:
  lines w0.254: -64.008,-35.687 -63.627,-35.306 ; -63.754,-22.352 -64.135,-21.971 ; -63.627,-37.592 -63.627,-35.306 ; -63.246,-35.687 -63.627,-35.306 ; -57.785,-1.016 -57.531,-1.27 ; -57.531,0.254 -57.531,-1.27 ; -14.351,-2.413 -14.097,-2.667 ; -14.097,-2.54 -14.097,-2.667 ; -14.097,-0.762 -14.097,-2.667 ; -13.843,-2.413 -14.097,-2.667 ; -5.334,-26.289 -5.08,-26.543 ; -5.08,-24.384 -5.08,-26.543 ; -4.826,-26.289 -5.08,-26.543 ; -64.135,-21.971 -64.516,-22.352 -64.135,-21.971 ; -64.135,-21.971 -64.135,-23.241 -64.135,-21.971 ; -57.531,-1.27 -57.277,-1.016 -57.531,-1.27 ; -67.691,-42.799 -59.69,-42.799 -59.69,-0.254 -67.691,-0.254 -67.691,-42.799 ; -67.056,-11.303 -51.435,-11.303 -51.435,-0.254 -67.056,-0.254 -67.056,-11.303 ; -66.929,-36.449 -51.435,-36.449 -51.435,-25.273 -66.929,-25.273 -66.929,-36.449 ; -66.929,-22.733 -51.435,-22.733 -51.435,-12.573 -66.929,-12.573 -66.929,-22.733 ; -59.245,-42.799 -50.8,-42.799 -50.8,-0.254 -59.245,-0.254 -59.245,-42.799 ; -21.463,-39.497 -13.208,-39.497 -13.208,-1.524 -21.463,-1.524 -21.463,-39.497 ; -21.082,-36.449 -3.81,-36.449 -3.81,-25.273 -21.082,-25.273 -21.082,-36.449 ; -20.955,-14.605 -3.81,-14.605 -3.81,-1.524 -20.955,-1.524 -20.955,-14.605 ; -12.827,-39.497 -3.302,-39.497 -3.302,-1.524 -12.827,-1.524 -12.827,-39.497
  text "Left Wheel" at -60.579,0.889 h1.52
  text "Right Wheel" at -22.987,0.127 h1.52
  text "5V IN" at -32.131,-3.302 h1.52
  text "Central" at -42.037,-10.795 h1.52
  text "H.M.R Designs" at -45.72,-22.733 h1.52
  text "link1/spin" at -19.685,-23.749 h1.52
  text "link2/suite" at -66.675,-24.765 h1.52
  text "Dir" at -18.796,-38.735 h1.52
  text "PWM" at -11.176,-38.862 h1.52
  text "Auger/swivel" at -67.818,-39.243 h1.52
  text "Dir" at -64.135,-44.831 h1.52
  text "PWM" at -57.785,-45.085 h1.52
  text "gnd" at -46.863,-48.895 h1.52
  text "3.3V" at -31.369,-49.022 h1.52
  text "TX" at -53.367,-49.43 h0.5
  text "12V" at -18.034,-49.657 h1.52
  text "GND" at -10.033,-49.784 h1.52
  text "RX" at -53.367,-51.716 h0.5
  text "gnd" at -53.367,-53.962 h0.5
  text "5V" at -18.161,-55.626 h1.52
  text "GND" at -9.398,-55.753 h1.52
  text "Pow" at -53.24,-56.669 h0.5
  text "gnd" at -6.604,-66.548 h1.52
  text "12V" at -15.367,-66.929 h1.52
  text "Fuse" at -40.005,-67.818 h1.52
Bottom Overlay:
  drawing of 42 lines, arcs and shapes, not listed
Mechanical 15:
  lines w0.254: -68.459,0.635 cw(c-63.246,0.635) -63.246,5.848 ; -68.449,0.635 -68.449,-80.997 ccw(c-63.091,-80.997) -62.95,-86.353 -6.248,-86.216 ccw(c-6.319,-79.899) -0.002,-79.828 0,0 ccw(c-5.969,-0.127) -6.096,5.842 -63.246,5.842

## Text inside footprints (layer, text, board x,y; h text height)
1: Top Overlay "ON DIP" at -64.365,-56.864 h1.52 r90
3: Top Overlay "Board edge" at -57.813,-83.528 h1.52